# EAGLE board LowellMakesBadge (EAGLE 7.2.0)
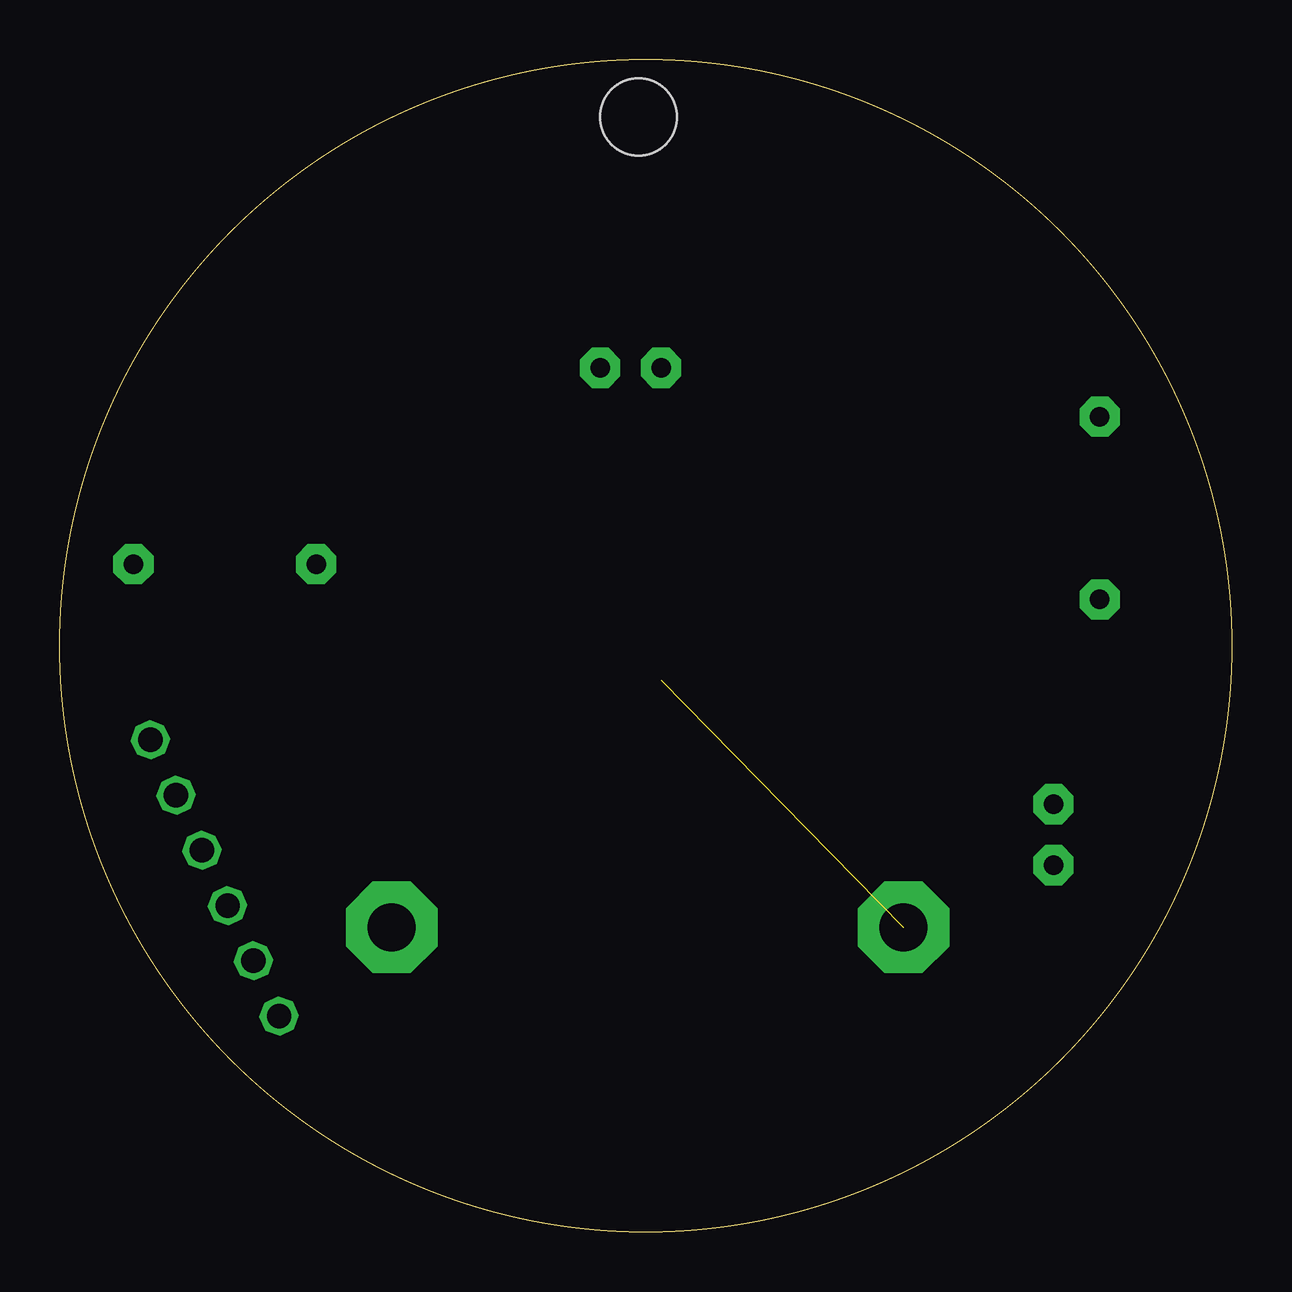
[diagram p0: board, top side]
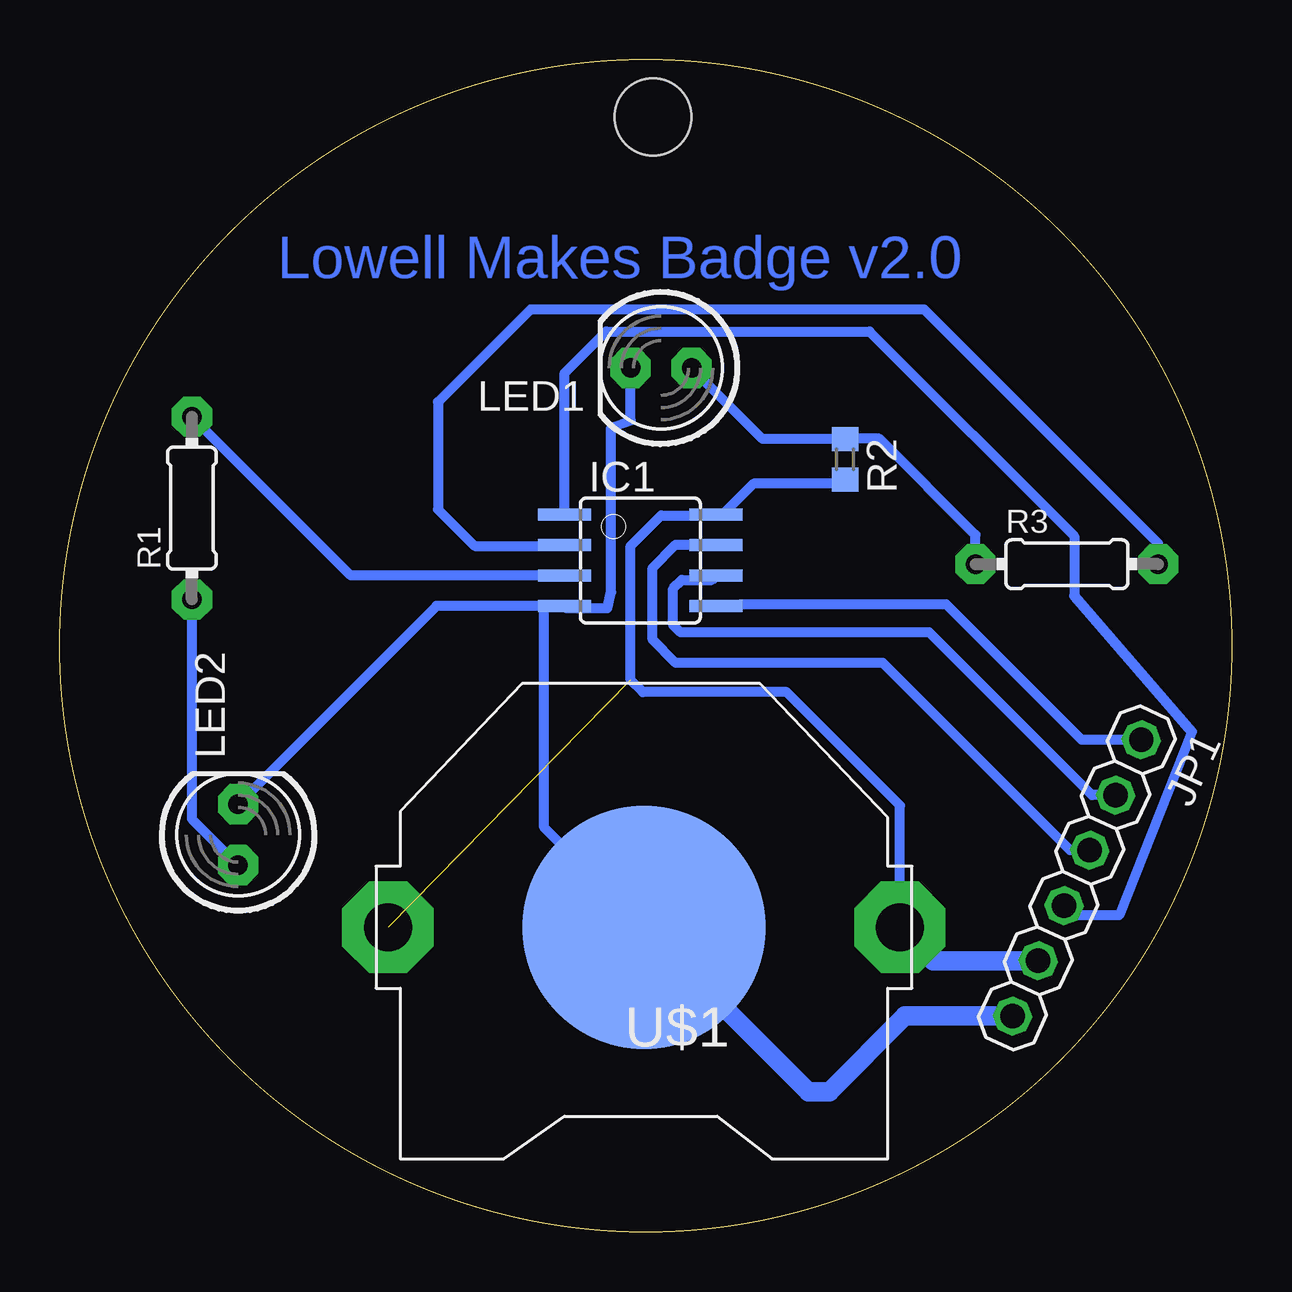
[diagram p1: board, bottom side, seen from below]

Size 48.84 x 48.84 mm. Coordinates in mm from the lower left corner, seen from the top.
Outline: circle at 24.42,24.42 radius 24.42
Copper layers (1*16): Top 0.035mm / dielectric 1.5mm / Bottom 0.035mm
Design rules "default *": minimum track width 15mil, minimum drill 24mil, track to track 10mil, track to pad 20mil, pad to pad 10mil, via to via 10mil, smd to smd 10mil, copper to edge 40mil, drill to drill 8mil, minimum pad ring 10mil, minimum via ring 8mil, stop-mask expansion 4mil, vias tented up to drill 0mil, thermal gap 10mil
Holes 3.2 mm at 24.11,46.47

## Footprints (pad centres in the part's own frame; a part is rotated, then mirrored left to right if it is on the bottom)
SOIC8 = smd 0.5 x 2.2: 1 -1.905,-3.154; 2 -0.645,-3.154; 3 0.625,-3.154; 4 1.895,-3.154; 5 1.905,3.154; 6 0.635,3.154; 7 -0.635,3.154; 8 -1.905,3.154
1X06 = drill 1.016 octagon: 1 -6.35,0; 2 -3.81,0; 3 -1.27,0; 4 1.27,0; 5 3.81,0; 6 6.35,0
LED5MM = drill 0.813 pad 1.676 octagon: A -1.27,0; K 1.27,0
0204/7 = drill 0.813 pad 1.676 octagon: 1 -3.81,0; 2 3.81,0
R0603 = smd 1 x 1.1: 1 -0.85,0; 2 0.85,0
CR2032-THRU = drill 2 pad 3.81 octagon: +1 -10.668,0; +2 10.668,0 | smd 10.16 x 10.16: - 0,0

## Placement (x,y rotation side)
IC1  TINY10S  [SOIC8]  24.65,27.98 270 bottom
JP1  [1X06]  6.45,14.74 245 bottom
LED1  [LED5MM]  23.78,36 180 bottom
LED2  [LED5MM]  41.41,16.55 90 bottom
R1  [0204/7]  43.34,30.16 90 bottom
R2  [R0603]  16.11,32.19 270 bottom
R3  [0204/7]  6.87,27.82 0 bottom
U$1  [CR2032-THRU]  24.5,12.68 180 bottom

## Library data of the parts
IC1 = atmel; OC_FARNELL: unknown; OC_NEWARK: unknown
JP1 LED1 LED2 R1-R3 U$1 = adafruit

## Nets
GND: IC1.4 JP1.6 LED1.K LED2.K U$1.-
N$2: LED2.A R1.1
N$3: IC1.2 R3.2
N$4: LED1.A R2.1 R3.1
N$5: IC1.3 R1.2
N$6: IC1.5 JP1.1
N$7: IC1.6 JP1.2
N$8: IC1.7 JP1.3
N$9: IC1.1 JP1.4
VCC: IC1.8 JP1.5 R2.2 U$1.+1 U$1.+2

## Tracks (layer width: path | path; a pad name or v marks a point on that pad's centre or on a via)
GND
  Bottom 0.406: 28.66,26.08 IC1.4 27.72,25.99 26.02,25.99 25.87,26.65 25.87,33.51 25.05,33.82 LED1.K | 28.66,26.08 33.15,26.08 LED2.K | U$1.- 28.66,16.85 28.66,26.08
  Bottom 0.813: JP1.6 13.61,8.99 16.77,5.83 17.64,5.83 U$1.-
N$2
  Bottom 0.406: R1.1 43.34,17.21 LED2.A
N$3
  Bottom 0.406: R3.2 3.06,28.69 12.81,38.44 29.22,38.44 33.08,34.58 33.08,30.11 31.56,28.58 27.84,28.58 IC1.2
N$4
  Bottom 0.406: LED1.A 19.55,33.04 R2.1 16.1,33.06 14.69,33.06 10.68,29.04 R3.1
N$5
  Bottom 0.406: IC1.3 36.72,27.35 R1.2
N$6
  Bottom 0.406: JP1.1 6.25,20.5 11.9,26.15 20.48,26.15 20.53,26.1 21.47,26.1 IC1.5
N$7
  Bottom 0.406: JP1.2 5.83,18.2 12.61,24.98 22.97,24.98 23.28,25.28 23.28,26.81 22.92,27.16 21.67,27.16 IC1.6
N$8
  Bottom 0.406: JP1.3 6.72,15.89 14.54,23.71 23.17,23.71 24.14,24.67 24.14,27.67 23.17,28.64 21.52,28.64 IC1.7
N$9
  Bottom 0.406: IC1.1 27.8,35.79 26.07,37.53 15.1,37.53 6.56,28.99 6.56,26.5 1.66,20.84 4.68,13.19 6.59,13.19 JP1.4
VCC  (1 unrouted)
  Bottom 0.406: R2.2 16.28,31.18 19.92,31.18 21.22,29.88 IC1.8 21.52,29.85 23.78,29.85 25.05,28.58 25.05,23 24.55,22.49 18.55,22.49 13.83,17.76 U$1.+1
  Bottom 0.813: JP1.5 12.43,11.29 U$1.+1

## Text on the board
Bottom: Lowell Makes Badge v2.0